# Altium PCB Copy of UAV_MCNV2P1.PcbDoc (part 2 of 2)
Units mil, origin at the board's own origin, x right, y up, seen from the top; angles counter-clockwise.
Board outline 1765.59 x 1577.6 mil, 6 copper layers (Component Side, Inner Layer 1, Power Plane (VCC), Ground Plane (GND), Inner Layer 2, Solder Side), stack 64.373 mil thick; 120 components, 102 nets, 559 pads, 317 vias.
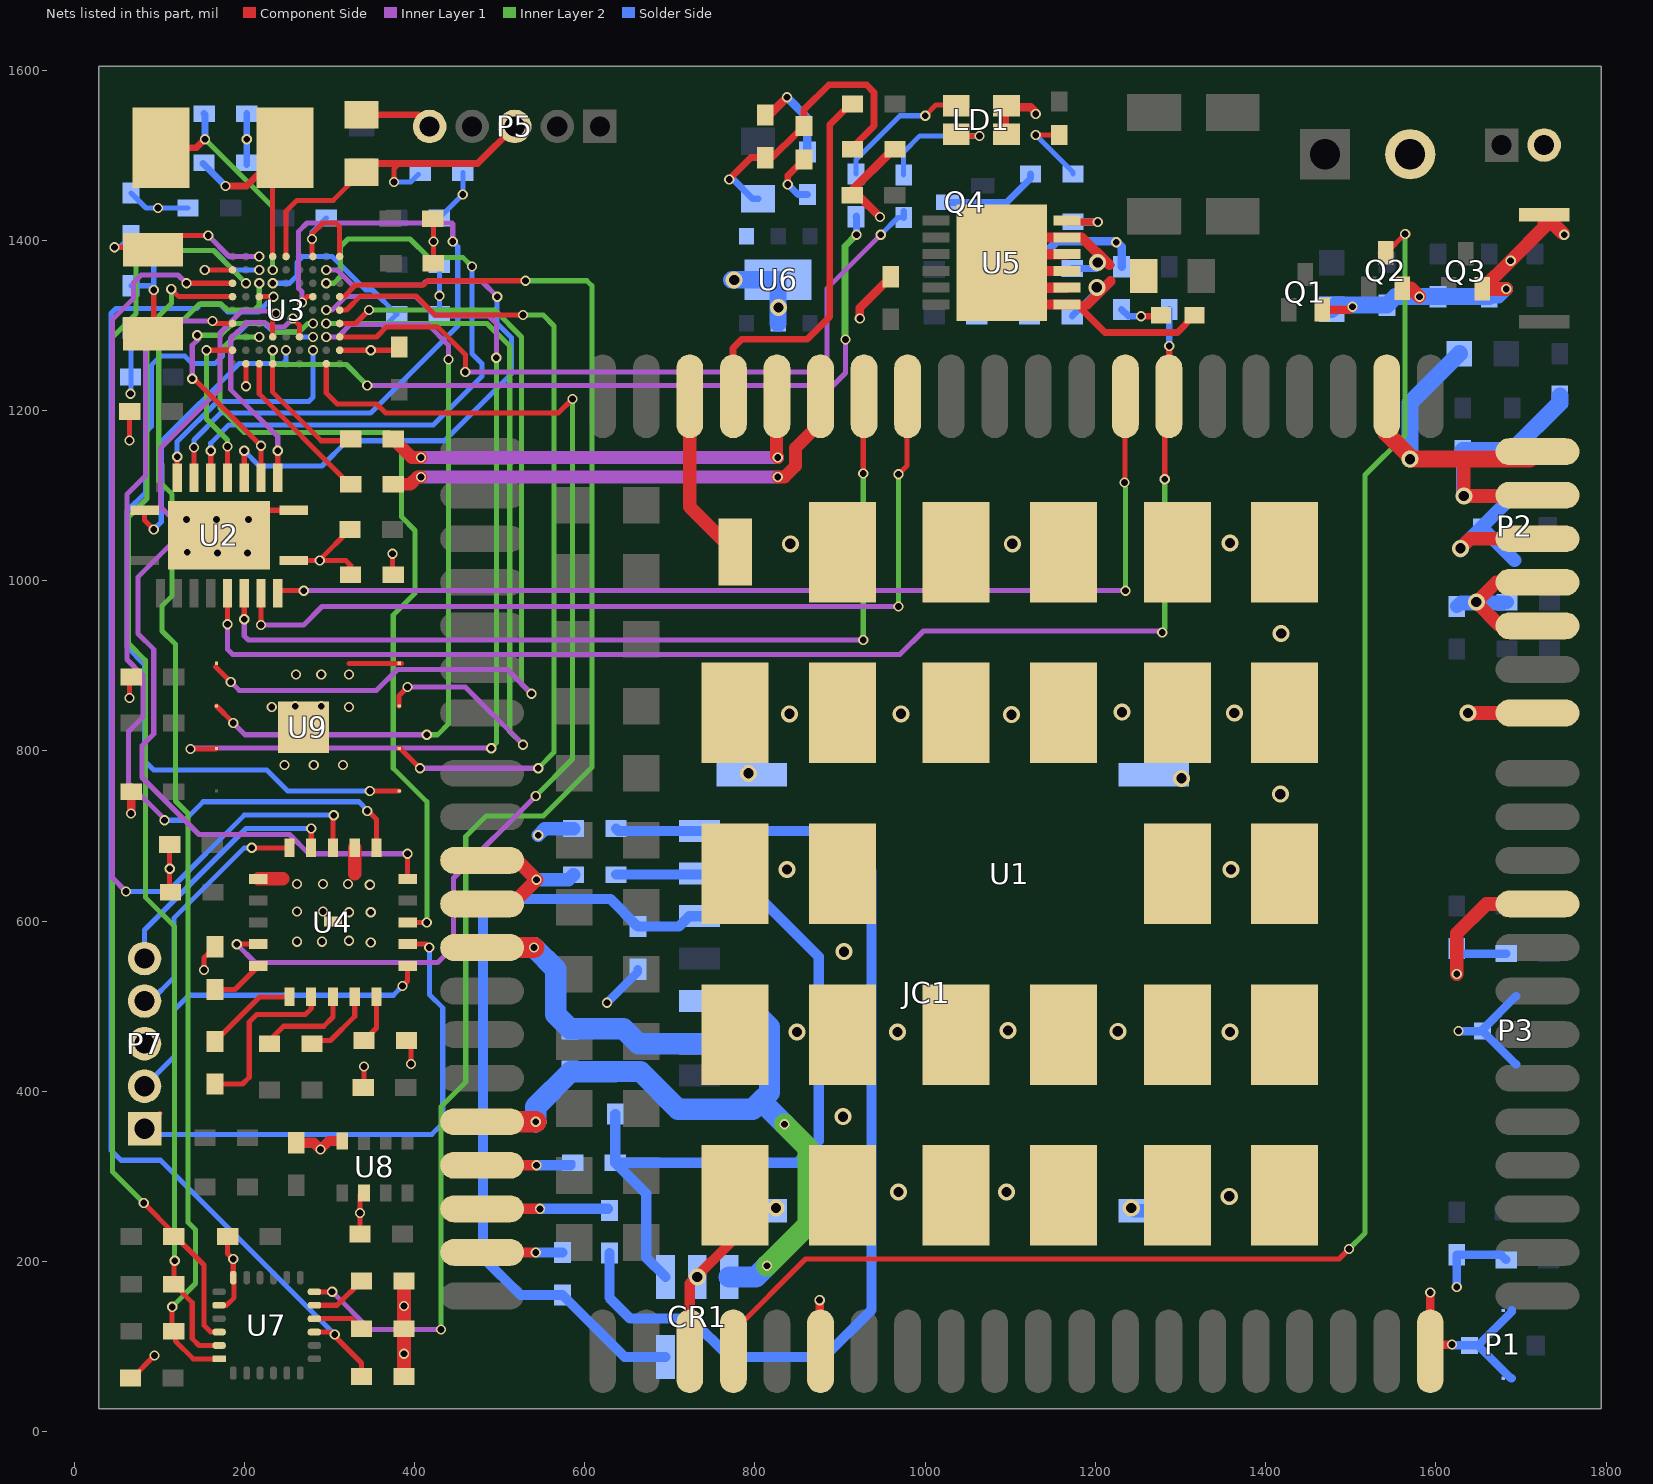
[diagram p6: the nets of this part, all layers, seen from the top]

## Via types
v1: diameter 12, hole 8, Component Side to Solder Side, 259 vias
v2: diameter 20, hole 12, Component Side to Solder Side, 55 vias
v3: diameter 47.24, hole 31.5, Component Side to Solder Side, 2 vias
v4: diameter 8.27, hole 7.87, Component Side to Solder Side, 1 vias

## Nets (pads, with @x,y where several pads share a name; then routed paths per layer and width w, separated by ;. In a path a pad name is that pad's centre, name@x,y a point inside that pad or via, vN(x,y) a via of type N, cw(c..) or ccw(c..) an arc to the next point about the centre after c; other vN are vias at no path point) (continued)
EC20_RI: U1.62 U2.9 | length 1226.4
  Component Side w6: U2.9@239.17,985.24 242.13,988.19 v1(269.68,988.19) ; v1(1234.25,1115.16) 1234.69,1115.6 U1.62@1234.69,1216.73
  Inner Layer 1 w6: v1(269.68,988.19) v1(1235.24,988.19)
  Inner Layer 2 w6: v1(1234.25,1115.16) 1235.24,1114.17 v1(1235.24,988.19)
EC20_RST: Q2.3 U1.20 | length 2046.3
  Component Side w6: U1.20@774.61,94.49 774.61,118.11 859.25,202.76 1486.22,202.76 v1(1498.03,214.57) ; Q2.3@1534.22,1385.07 Q2.3@1541.01,1385.07 1541.57,1385.07 v1(1563.98,1407.48)
  Inner Layer 2 w6: v1(1498.03,214.57) 1516.73,233.27 1516.73,1124.02 1563.98,1171.26 v1(1563.98,1407.48)
EC20_RX: U1.68 U2.7 | length 1067.4
  Component Side w6: v1(199.8,954.72) U2.7@199.8,985.24 ; v1(927.17,1125.98) 927.17,1216.29 U1.68@927.61,1216.73
  Inner Layer 1 w6: v1(199.8,954.72) 199.8,935.04 204.72,930.12 v1(927.17,930.12) ; v1(927.17,1125.98) v1@927.17,1126.97
  Inner Layer 2 w6: v1(927.17,930.12) v1(927.17,1125.98)
EC20_STA: R4.1 U1.61 U2.6 | length 1573.1
  Component Side w6: v1(180.12,948.82) U2.6@180.12,985.24 ; v1(1281.5,1119.09) 1281.5,1192.67 1294.29,1205.46 1284.45,1215.31 U1.61@1285.87,1216.73
  Component Side w8: U1.61@1285.87,1216.73 1286.7,1217.56 v1(1286.7,1275.73)
  Inner Layer 1 w6: v1(180.12,948.82) 180.12,919.29 186.02,913.39 970.47,913.39 998.03,940.94 1276.57,940.94 v1(1278.54,938.98)
  Inner Layer 2 w6: v1(1278.54,938.98) 1276.57,938.98 1281.5,943.9 v1(1281.5,1119.09)
  Solder Side w8: v1(1286.7,1275.73) R4.1@1286.7,1318.73
EC20_TX: U1.67 U2.8 | length 1056
  Component Side w6: v1(219.49,947.83) U2.8@219.49,985.24 ; v1(968.5,1125) 978.79,1135.28 978.79,1216.73 982.28,1213.24 U1.67@979.33,1210.28
  Inner Layer 1 w6: v1(219.49,947.83) 269.69,947.83 291.34,969.49 v1(968.5,969.49)
  Inner Layer 2 w6: v1(968.5,969.49) v1(968.5,1125)
FLASH_CS: U3.G3 U9.1 | length 1029.1
  Component Side w6: v1(347.44,752.95) 347.64,752.76 U9.1@381.89,752.76
  Solder Side w6: v1(280.51,1286.42) 267.72,1286.42 261.81,1292.32 233.27,1292.32 222.44,1303.15 204.72,1303.15 174.21,1272.64 174.21,1263.78 165.35,1254.92 138.78,1254.92 129.92,1263.78 101.38,1263.78 90.55,1252.95 90.55,1181.1 83.66,1174.21 83.66,1103.35 62.01,1081.69 62.01,922.24 82.68,901.57 82.68,788.39 93.5,777.56 226.38,777.56 250.98,752.95 v1(347.44,752.95)
GND: C1.2 C2.2 C3.2 C5.2 C6.2 C7.2 C8.1 C9.1 C10.1 C11.1 C12.1 C13.1 C14.2 C15.2 C16.1 C17.2 C18.2 C19.1 C20.1 C21.2 C22.2 C23.2 C24.1 C25.2 C26.1 C27.2 C29.1 C30.2 C32.2 C33.2 C34.1 C35.1 C36.1 C37.1 C39.2 C40.1 C41.1 C42.1 C43.1 C44.1 C45.1 C46.1 C47.2 C48.1 C49.2 C50.1 C51.1 C52.2 C53.1 C54.2 CR1.2 D1.1 JC1.0 JP1.2 LD1.2 P1.2 P1.3 P1.4 P2.2 P2.3 P2.4 P3.2 P3.3 P3.4 P4.2 P5.5 P7.3 Q1.2 Q2.2 Q3.2 Q4.2 R10.2 R11.2 R16.2 R19.2 R22.2 R23.1 R27.1 R30.1 SB1.2 U1.8 U1.9 U1.19 U1.22 U1.36 U1.46 U1.48 U1.50 U1.51 U1.52 U1.53 U1.54 U1.56 U1.72 U1.85 U1.86 U1.87 U1.88 U1.89 U1.90 U1.91 U1.92 U1.93 U1.94 U1.95 U1.96 U1.97 U1.98 U1.99 U1.100 U1.101 U1.102 U1.103 U1.104 U1.105 U1.106 U1.107 U1.108 U1.109 U1.110 U1.111 U1.112 U2.11 U2.21 U3.A8 U3.B1 U3.G9 U3.J2 U3.J9 U4.12 U4.16 U4.21 U6.2 U6.7 U7.18 U7.20 U8.1 U8.7 U9.4 U9.9 | length 5834
  Component Side w6: v1(64.96,862.2) 64.96,886.61 C16.1@65.16,886.81 ; v1(65.16,1164.57) C20.1@65.16,1198.82 ; C49.2@68.11,62.99 v1(94.49,89.37) ; C51.1@112.2,689.96 v1(112.2,661.42) 112.2,634.84 C32.2@113.19,633.86 ; v1(152.56,542.32) 152.56,556.89 C30.2@165.35,569.68 ; v1(153.54,1365.16) U3.A8@186.02,1365.16 ; U2.21@170.28,1053.15 199.8,1082.68 U2.11@257.87,1082.68 ; U7.20@170.3,148.53 179.04,148.53 187.99,157.48 187.99,179.83 U7.18@186.93,180.89 v1(186.93,202.84) 180.31,209.45 C47.2@180.31,229.33 ; v1(201.77,1228.35) U3.B1@201.77,1254.92 ; U4.16@216.54,649.61 U4.16@217.52,650.59 ; C46.1@254.92,339.57 C46.1@260.83,339.57 ; U3.G9@280.51,1380.91 279.53,1381.89 v1(279.53,1401.57) 279.53,1407.48 292.32,1420.28 307.09,1420.28 312.01,1415.35 U3.J9@312.01,1380.91 ; U3.J2@312.01,1270.67 378.15,1270.67 C24.1@381.89,1274.41 ; U8.1@315.95,340.55 U8.1@316.93,341.54 ; 323.03,902.76 384.84,902.76 ; C45.1@335.83,232.28 v1(335.83,256.89) U8.7@335.83,278.35 ; R23.1@339.76,404.53 340.55,405.31 v1(340.55,429.13) ; U8.7@342.52,280.51 U8.7@344.68,278.35 ; v1(374.02,1031.5) 374.02,1007.68 R10.2@374.8,1006.89 ; C29.1@390.55,459.64 395.67,454.53 v1(395.67,432.09) ; C52.2@428.15,1425.2 422.24,1419.29 v1(422.24,1398.62) 422.24,1378.74 C53.1@429.92,1371.06
  Component Side w8: SB1.2@337.7,1547.48 403.95,1547.48 P5.5@417.7,1533.73
  Component Side w10: v1(66.93,726.38) 67.13,726.57 C50.1@67.13,751.97 ; U1.112@776.57,227.36 U1.112@776.57,277.56 ; C44.1@812.01,1547.05 816.73,1547.05 v1(837.6,1567.91) ; v1(875.98,154.53) 875.98,95.47 U1.22@876.97,94.49 ; v1(923.23,1308.07) 923.23,1320.67 C42.1@959.65,1357.09 ; v1(946.85,1427.17) 921.26,1452.76 C41.1@914.37,1452.76 912.4,1452.76 912.4,1456.89 C43.1@962.4,1506.89 ; LD1.2@1093.5,1522.64 1093.5,1556.1 1124.02,1556.1 1129.92,1550.2 v1(1129.92,1548.23) ; Q1.2@1466.38,1318.39 1498.51,1318.39 v1(1501.97,1321.85) ; v1(1593.5,163.39) U1.36@1593.5,94.49 1601.38,102.36 v1(1619.09,102.36)
  Component Side w12: C46.1@260.83,339.57 281.5,339.57 v1(289.37,331.69) 299.21,341.54 U8.1@314.96,341.54 ; U1.19@723.43,94.49 723.43,174.21 U1.112@776.57,227.36
  Component Side w16: U4.16@216.54,649.61 245.08,649.61 ; 329.72,655.51 U4.12@329.72,686.02 ; R30.1@387.6,64.96 v1(387.6,91.54) C48.1@387.6,121.06 v1(387.6,147.64) R27.1@387.6,177.17 ; U1.9@479.33,620.08 514.76,620.08 v1(543.31,648.62) 520.67,671.26 U1.8@479.33,671.26 ; U1.72@723.43,1216.53 723.43,1086.61 U1.108@776.57,1033.46 ; Q2.2@1560.7,1343.73 1570.64,1343.73 v1(1580.71,1333.66) ; v1(1624.7,537.7) 1624.7,585.33 1659.45,620.08 U1.46@1719.49,620.08 ; v2(1628.94,1037.97) 1640.18,1049.21 U1.52@1719.49,1049.21 ; 1632.87,1142.73 v2(1632.87,1099.41) 1718.51,1099.41 U1.53@1719.49,1100.39 ; v2(1637.8,844.49) U1.48@1719.49,844.49 ; v1(1682.86,1342.73) Q3.2@1654.7,1342.73 v1(1687.95,1375.98) 1727.36,1415.39 D1.1@1727.36,1430.12 v1@1749.02,1408.46 ; U1.50@1719.49,946.85 1675.52,946.85 v2(1647.64,974.73) 1670.94,998.03 U1.51@1719.49,998.03
  Component Side w20: U1.56@1541.78,1216.73 1541.78,1173.65 1569.7,1145.73 v2(1569.7,1142.73) 1632.87,1142.73 1709.9,1142.73 U1.54@1718.94,1151.77
  Solder Side w6: v1(66.14,1219.68) 66.93,1220.47 C27.2@66.93,1296.46 ; C25.2@66.93,1455.51 84.45,1437.99 v1(98.43,1437.99) C26.1@133.86,1437.99 ; v1(279.53,1401.57) 279.53,1409.45 C18.2@296.26,1426.18 ; C23.2@422.24,1377.95 C23.2@429.13,1371.06 v1(429.13,1334.65) R11.2@429.13,1312.99 ; C17.2@429.13,1426.18 v1(456.7,1453.75) C19.1@456.7,1479.73
  Solder Side w8: C21.2@202.7,1488.73 202.7,1518.7 C22.2@202.7,1548.73
  Solder Side w10: v1(625.98,503.94) 662.4,540.35 C35.1@662.4,543.5 ; v1(837.6,1567.91) 861.7,1543.81 R22.2@861.7,1503.73 ; C33.2@1060.7,1310.73 C39.2@1122.7,1310.73 C40.1@1122.7,1366.73 ; C34.1@1060.7,1365.73 1121.7,1365.73 C40.1@1122.7,1366.73 ; Q4.2@1067.7,1424.73 1120.7,1424.73 R16.2@1123.7,1421.73 C40.1@1123.7,1367.73 ; R19.2@1230.7,1368.73 1230.7,1392.33 1225.39,1397.64 1224.41,1398.62 1154.59,1398.62 C40.1@1123.7,1367.73 ; v1(1619.09,102.36) 1620.08,101.38 P1.3@1639.76,101.38 P1.3@1649.61,101.38 ; v1(1624.7,169.98) C1.2@1624.7,207.73 1676.7,207.73 C5.2@1682.7,201.73 ; v1(1624.7,537.7) C3.2@1624.7,567.73 1630.7,561.73 C15.2@1682.7,561.73 ; C2.2@1624.7,969.73 1678.7,969.73 C14.2@1683.7,974.73 ; v1(1626.71,470.73) P3.3@1654.94,470.73 ; 1688.98,62.58 1688.4,62.58 P1.3@1649.61,101.38 ; 1688.98,142.38 1688.98,140.75 P1.3@1649.61,101.38 ; P2.2@1692.49,1023.94 P2.2@1693.07,1023.94 ; P3.2@1694.31,431.94 1693.73,431.94 P3.3@1654.94,470.73 ; P3.4@1694.31,511.73 1654.94,472.36 P3.3@1654.94,470.73 ; C40.1@1122.7,1366.73 C40.1@1123.7,1367.73
  Solder Side w16: v1(543.31,648.62) 580.91,648.62 C37.1@586.81,654.53 ; v1(545.28,700.79) 553.15,708.66 C36.1@586.81,708.66 ; v2(1242.13,262.8) 1245.28,259.65 JC1.0@1296.85,259.65 ; C2.2@1624.7,969.73 1629.7,974.73 v2(1647.64,974.73) C14.2@1683.7,974.73 ; v2@1628.94,1035.43 v2(1628.94,1037.97) P2.3@1653.7,1062.73 ; v2@1631.7,1100.58 C13.1@1631.7,1152.73 ; C9.1@1662.7,1333.73 1673.86,1333.73 v1(1682.86,1342.73) ; P2.2@1692.49,1023.94 P2.3@1653.7,1062.73 ; P2.4@1693.07,1103.73 1693.07,1102.1 P2.3@1653.7,1062.73
  Solder Side w20: v2@772.64,1353.35 772.84,1353.55 U6.7@827.3,1353.55 U6.2@827.3,1302.37 ; C6.2@1477.7,1318.73 1482.7,1323.73 C8.1@1542.7,1323.73 1552.7,1333.73 C10.1@1602.7,1333.73 C9.1@1662.7,1333.73 ; v2(1569.7,1142.73) 1569.7,1208.73 C7.2@1627.7,1266.73 ; C13.1@1631.7,1152.73 C12.1@1689.7,1152.73 1745.7,1208.73 C11.1@1745.7,1216.73
  other v1: 348.43,574.8 261.81,575.79 291.34,575.79 322.83,576.77 322.83,610.24 348.43,610.24 261.81,611.22 292.32,611.22 347.44,642.72 261.81,643.7 292.32,643.7 321.85,643.7 247.05,783.46 281.5,783.46 315.94,783.46 232.28,851.38 322.83,851.38 259.84,852.36 290.35,852.36 260.83,889.76 290.35,889.76 322.83,889.76 168.31,1032.48 203.74,1032.48 132.87,1033.46 131.89,1071.85 167.32,1071.85 204.72,1071.85 348.43,1270.67 1224.41,1397.64 1750.98,1406.5 202.76,1518.7
  other v2: 732.28,181.84 824.8,262.8 1357.28,276.57 968.5,281.5 1095.47,281.5 903.54,370.08 849.41,469.49 967.52,469.49 1358.27,469.49 1226.38,470.47 1097.44,471.46 904.53,563.98 837.6,660.43 1359.25,660.43 1417.32,749.02 1301.18,767.72 792.32,773.62 1101.38,842.52 840.55,843.5 971.46,843.5 1363.19,844.49 1231.3,845.47 1418.31,937.99 841.54,1043.31 1102.36,1043.31 1358.27,1044.29 827.76,1320.87 775.59,1353.35
MCU_232_RX: P7.2 U4.6 | length 410
  Component Side w6: v1(385.83,523.62) 391.73,529.53 U4.6@391.73,547.24
  Solder Side w6: P7.2@82.68,405.91 118.11,441.34 118.11,496.06 134.84,512.8 375,512.8 v1(385.83,523.62)
MCU_232_TX: P7.1 U4.7 | length 624.4
  Component Side w6: P7.1@82.68,355.91 P7.1@100.79,374.02 ; U4.7@391.73,572.84 413.38,572.84 v1(417.32,568.9)
  Solder Side w6: P7.1@82.68,355.91 89.17,349.41 420.28,349.41 433.07,362.2 433.07,498.03 417.32,513.78 v1(417.32,568.9)
MCU_DBRX: U3.C3 U4.8 | length 968.7
  Component Side w6: U4.8@391.73,598.43 v1(414.37,598.43)
  Inner Layer 2 w6: v1(217.52,1286.42) 187.99,1286.42 171.26,1269.69 171.26,1202.76 199.8,1174.21 370.08,1174.21 384.84,1159.45 384.84,1074.8 400.59,1059.06 400.59,985.24 375,959.65 375,779.53 414.37,740.16 v1(414.37,598.43)
MCU_DBTX: U3.D3 U4.10 | length 1072.2
  Component Side w6: U3.D3@233.27,1286.42 233.27,1310.04 v1(237.2,1313.98) ; U4.10@391.73,649.61 v1(391.73,679.13)
  Inner Layer 1 w6: v1(237.2,1313.98) 235.24,1313.98 232.28,1316.93 196.85,1316.93 171.26,1291.34 171.26,1225.39 101.38,1155.51 101.38,1086.61 114.17,1073.82 114.17,1043.31 74.8,1003.94 74.8,937.99 93.5,919.29 93.5,819.88 79.72,806.1 79.72,768.7 146.65,701.77 252.95,701.77 275.59,679.13 v1(391.73,679.13)
MCU_EC20_DBRX: U2.16 U3.H7 | length 752.8
  Component Side w6: U2.16@160.43,1121.06 v1(160.43,1152.56)
  Inner Layer 2 w6: v1(296.26,1349.41) 305.12,1349.41 312.99,1357.28 312.99,1392.72 321.85,1401.57 394.69,1401.57 416.34,1379.92 456.69,1379.92 v1(467.52,1369.09)
  Solder Side w6: v1(160.43,1152.56) 160.43,1161.42 182.09,1183.07 422.24,1183.07 479.33,1240.16 479.33,1254.92 467.52,1266.73 v1(467.52,1369.09)
MCU_EC20_DBTX: U2.17 U3.G6 | length 819.4
  Component Side w6: U2.17@140.75,1121.06 v1(140.75,1156.5) ; v1(267.72,1326.77) 267.72,1327.76 273.62,1333.66 U3.G6@280.51,1333.66
  Inner Layer 1 w6: v1(267.72,1326.77) 267.72,1339.57 263.78,1343.5 263.78,1410.43 273.62,1420.28 443.9,1420.28 444.88,1419.29 v1(444.88,1398.62)
  Solder Side w6: v1(140.75,1156.5) 140.75,1165.35 172.24,1196.85 348.43,1196.85 450.79,1299.21 450.79,1392.72 v1(444.88,1398.62)
MCU_EC20_NMODE: U2.18 U3.G2 | length 278.6
  Component Side w6: U2.18@121.06,1121.06 v1(121.06,1145.67)
  Solder Side w6: v1(121.06,1145.67) 121.06,1163.39 168.31,1210.63 275.77,1210.63 280.51,1215.37 v1(280.51,1270.67)
MCU_EC20_RDY: U2.20 U3.E2 | length 332.1
  Component Side w6: U2.20@82.68,1082.68 82.68,1070.87 v1(93.5,1060.04)
  Solder Side w6: v1(93.5,1060.04) 102.36,1068.9 102.36,1163.39 193.9,1254.92 245.08,1254.92 249.02,1258.86 v1(249.02,1270.67)
MCU_EC20_RI: U2.12 U3.F3 | length 297.8
  Component Side w6: U2.12@239.17,1121.06 v1(239.17,1152.56) ; v1(256.89,1308.07) 264.76,1300.2 U3.F3@264.76,1286.42
  Inner Layer 1 w6: v1(239.17,1152.56) 239.17,1169.29 184.06,1224.41 184.06,1284.45 202.76,1303.15 224.41,1303.15 229.33,1298.23 247.05,1298.23 v1(256.89,1308.07)
MCU_EC20_RX: U2.13 U3.G4 | length 357.1
  Component Side w6: v1(138.78,1237.2) 140.75,1237.2 v1(219.49,1158.46) U2.13@219.49,1121.06
  Inner Layer 1 w6: v1(138.78,1237.2) 138.78,1276.57 146.65,1284.45 144.68,1286.42 v1(144.68,1288.39)
  Inner Layer 2 w6: v1@145.67,1289.37 v1(144.68,1288.39) 172.24,1288.39 186.02,1302.17 225.39,1302.17 235.24,1292.32 264.76,1292.32 274.61,1302.17 v1(280.51,1302.17)
MCU_EC20_STA: U2.15 U3.A2 | length 190.3
  Component Side w6: v1(155.51,1270.67) U3.A2@186.02,1270.67 ; U2.15@180.12,1121.06 v1(180.12,1157.48)
  Inner Layer 2 w6: v1(155.51,1270.67) 155.51,1189.96 180.12,1165.35 v1(180.12,1157.48)
MCU_EC20_TX: U2.14 U3.H8 | length 712.2
  Component Side w6: U2.14@199.8,1121.06 v1(199.8,1152.56)
  Inner Layer 1 w6: v1(296.26,1365.16) 309.06,1365.16 326.77,1347.44 409.45,1347.44 413.39,1351.38 479.33,1351.38 v1(497.05,1333.66)
  Solder Side w6: v1(199.8,1152.56) 217.52,1134.84 291.34,1134.84 320.87,1164.37 435.04,1164.37 513.78,1243.11 513.78,1285.43 497.05,1302.17 v1(497.05,1333.66)
MCU_LED_G: R8.1 U3.D2 | length 894.7
  Inner Layer 1 w6: v1(344.49,1229.33) 891.73,1229.33 906.5,1244.09 v1(906.5,1283.46)
  Inner Layer 2 w6: v1(233.27,1270.67) 233.27,1257.87 237.2,1253.94 319.88,1253.94 v1(344.49,1229.33)
  Inner Layer 2 w8: v1@905.7,1283.46 905.7,1392.91 v1(919.29,1406.5)
  Solder Side w8: R8.1@918.7,1427.73 919.29,1428.32 v1(919.29,1406.5)
MCU_LED_R: R7.1 U3.J3 | length 834.2
  Component Side w6: U3.J3@312.01,1286.42 355.31,1286.42 367.13,1298.23 427.17,1298.23 459.65,1265.75 v1(459.65,1245.08)
  Inner Layer 1 w6: v1(459.65,1245.08) 869.09,1245.08 884.84,1260.83 884.84,1343.5 v1(947.83,1406.5)
  Solder Side w6: v1@949.66,1406.5 v1(947.83,1406.5) 968.07,1426.73 R7.1@974.7,1426.73
  Solder Side w8: R7.1@974.7,1426.73 R7.1@974.7,1433.73
MP_CS: R24.1 U3.B7 U7.22 | length 1475.1
  Component Side w6: v1(81.69,268.7) 117.13,233.27 R24.1@117.13,229.33 ; R24.1@119.09,229.33 152.56,195.87 152.56,125 160.53,117.03 U7.22@170.31,117.03
  Inner Layer 2 w6: v1(81.69,268.7) 45.28,305.12 45.28,1286.42 72.83,1313.98 72.83,1373.03 87.6,1387.8 163.39,1387.8 v1(201.77,1349.41)
MP_INT: U3.J6 U7.12 | length 1812.6
  Component Side w6: U7.12@282.3,164.28 303.06,164.28 v1(303.15,164.37) ; U3.J6@312.01,1333.66 316.93,1333.66 330.71,1347.44 410.43,1347.44 415.35,1352.36 v1(530.51,1352.36)
  Inner Layer 1 w6: v1(303.15,164.37) 347.44,120.08 v1(431.1,120.08)
  Inner Layer 2 w6: v1(431.1,120.08) 431.1,381.89 460.14,410.93 460.14,699.31 484.25,723.43 551.18,723.43 608.27,780.51 608.27,1346.46 602.36,1352.36 v1(530.51,1352.36)
MP_SCK: R29.1 U3.A6 U7.23 | length 1396.2
  Component Side w6: v1(114.17,1342.52) 123.03,1333.66 U3.A6@186.02,1333.66 ; v1(118.11,200.79) 117.13,199.8 R29.1@117.13,173.23 138.78,151.58 138.78,109.25 146.75,101.28 U7.23@170.31,101.28
  Inner Layer 2 w6: v1(114.17,1342.52) 114.17,1325.79 85.63,1297.24 85.63,1096.46 63.98,1074.8 63.98,926.18 83.66,906.5 83.66,627.95 118.11,593.5 v1(118.11,200.79)
MP_SDI: R26.1 U3.C7 U7.24 | length 1439.6
  Component Side w6: v1(115.16,146.65) 115.16,120.08 R26.1@117.13,118.11 ; R26.1@119.09,118.11 119.09,106.3 139.86,85.54 U7.24@170.31,85.54
  Inner Layer 2 w6: v1(115.16,146.65) 142.72,174.21 142.72,237.2 133.86,246.06 133.86,726.38 119.09,741.14 119.09,925.2 103.35,940.94 103.35,970.47 115.16,982.28 115.16,1101.38 99.41,1117.13 99.41,1277.56 146.65,1324.8 173.23,1324.8 180.12,1317.91 211.61,1317.91 217.52,1323.82 v1(217.52,1349.41)
MP_SDO: R30.2 U3.C6 U7.9 | length 1645
  Component Side w6: U3.C6@217.52,1333.66 v1(234.25,1333.66) ; U7.9@282.28,117.03 301.27,117.03 337.6,80.71 R30.2@337.6,64.96
  Solder Side w6: v1(234.25,1333.66) 216.54,1315.94 180.12,1315.94 171.26,1324.8 148.62,1324.8 143.7,1319.88 49.21,1319.88 43.31,1313.98 43.31,330.71 55.12,318.9 101.38,318.9 v1(306.1,114.17)
NetC21_1: C21.1 U3.D9 X1.2 | length 239.2
  Component Side w6: U3.D9@233.27,1380.91 233.27,1494.3 X1.2@247.7,1508.73
  Component Side w8: v1(177.7,1463.73) 202.7,1463.73 X1.2@233.27,1494.3
  Solder Side w8: C21.1@151.43,1490.01 v1(177.7,1463.73)
NetC22_1: C22.1 U3.D8 X1.1 | length 272.8
  Component Side w8: X1.1@102.03,1508.73 143.7,1508.73 v1(153.7,1518.73)
  Inner Layer 2 w6: v1(153.7,1518.73) 233.27,1439.17 v1(233.27,1365.16)
  Solder Side w8: C22.1@152.7,1548.73 153.7,1547.73 v1(153.7,1518.73)
NetC25_1: C25.1 U3.C9 X2.2 | length 197.4
  Component Side w6: v1(47.24,1391.73) 89.7,1391.73 X2.2@92.7,1388.73 ; X2.2@105.32,1405.51 v1(157.48,1405.51)
  Inner Layer 1 w6: v1(157.48,1405.51) 182.09,1380.91 v1(217.52,1380.91)
  Solder Side w6: v1@47.24,1388.78 v1(47.24,1391.73) 53.15,1391.73 C25.1@66.93,1405.51
NetC27_1: C27.1 U3.C8 X2.1 | length 256.4
  Component Side w6: X2.1@92.7,1290.31 93.5,1291.11 v1(93.5,1341.54)
  Solder Side w6: C27.1@66.93,1346.46 88.58,1346.46 v1(93.5,1341.54) 93.5,1381.89 99.41,1387.8 164.37,1387.8 187.01,1365.16 v1(217.52,1365.16)
NetC28_1: C28.1 U4.3 | length 109.8
  Component Side w6: C28.1@229.33,459.64 246.06,476.38 293.31,476.38 304.13,487.21 U4.3@304.13,510.83
NetC28_2: C28.2 U4.4 | length 84.9
  Component Side w6: C28.2@279.33,459.64 301.18,459.64 329.72,488.19 U4.4@329.72,510.83
NetC29_2: C29.2 U4.5 | length 57.3
  Component Side w6: C29.2@340.55,459.64 355.31,474.41 U4.5@355.31,510.83
NetC30_1: C30.1 U4.20 | length 62.6
  Component Side w6: C30.1@165.35,519.68 188.98,519.68 U4.20@216.54,547.24
NetC31_1: C31.1 U4.1 | length 109.3
  Component Side w6: C31.1@165.35,458.46 217.72,510.83 U4.1@252.95,510.83
NetC31_2: C31.2 U4.2 | length 201.7
  Component Side w6: C31.2@165.35,408.46 197.83,408.46 205.71,416.34 205.71,481.3 214.57,490.16 271.65,490.16 278.54,497.05 U4.2@278.54,510.83
NetC35_2: C35.2 CR1.5 JC1.2 R15.2 | length 953.4
  Solder Side w12: CR1.5@694.88,87.84 646.61,87.84 R15.2@573.82,160.63 524.41,160.63 480.32,204.72 480.32,606.3 500,625.98 629.92,625.98 C35.2@662.4,593.5 710.63,593.5 722.83,605.71 JC1.2@742.52,605.71
NetC36_2: C36.2 CR1.4 JC1.3 R14.2 | length 1248.5
  Solder Side w12: R14.2@628.94,209.84 628.94,157.48 653.54,132.87 724.65,132.87 CR1.4@769.69,87.84 881.65,87.84 937.01,143.2 937.01,658.46 889.76,705.71 639.76,705.71 C36.2@636.81,708.66
NetC37_2: C37.2 CR1.1 JC1.7 R13.2 R17.1 | length 961.3
  Solder Side w12: R17.1@635.83,373.23 R13.2@635.83,315.94 ; C37.2@636.81,654.53 761.61,654.53 762.8,655.71 777.36,655.71 875,558.07 875,341.54 849.41,315.94 R13.2@635.83,315.94 ; CR1.1@694.88,181.84 672.24,204.48 672.24,279.53 R13.2@635.83,315.94
NetC39_1: C39.1 C40.2 LD2.1 SB2.1 U5.1 U5.2 U5.3 U5.4 U5.5 U5.13 | length 731.4
  Component Side w8: U5.13@1119.23,1403.26 1099.54,1383.57 U5.13@1089.7,1373.73 1099.54,1363.89 1119.23,1344.2 U5.13@1138.91,1324.52 ; U5.1@1178.49,1324.52 1211.28,1291.73 1296.39,1291.73 LD2.1@1315.39,1310.73 ; 1183.49,1324.52 1190.49,1324.52 ; LD2.1@1315.39,1310.73 LD2.1@1316.39,1311.73 1316.7,1310.73 LD2.1@1315.39,1310.73
  Component Side w12: U5.13@1099.54,1363.89 U5.3@1166.57,1363.89 ; U5.13@1099.54,1383.57 U5.4@1166.57,1383.57 ; U5.13@1119.23,1344.2 U5.2@1166.57,1344.2 ; U5.13@1119.23,1403.26 U5.5@1166.57,1403.26 1184.17,1403.26 1216.7,1370.73 ; U5.13@1138.91,1324.52 U5.1@1166.57,1324.52 U5.1@1178.49,1324.52 ; 1190.49,1324.52 1217.7,1351.73
  Solder Side w8: C39.1@1172.7,1310.73 1198.7,1336.73 1190.49,1324.52 ; C40.2@1172.7,1366.73 v2@1201.7,1366.73
  other v2: 1201.7,1344.73 1202.7,1373.73
NetC43_2: C43.2 C44.2 LD4.1 SB3.1 U6.4 | length 365.2
  Component Side w8: v1(769.68,1471.46) 795.28,1497.05 C44.2@812.01,1497.05 C44.2@812.01,1488.72 ; C44.2@811.7,1488.42 C44.2@812.01,1488.72 ; C43.2@912.4,1506.89 939.96,1534.45 939.96,1573.82 931.1,1582.68 886.81,1582.68 857.7,1553.57 LD4.1@857.7,1534.42 C44.2@812.01,1488.72
  Solder Side w8: v1(769.68,1471.46) 774.61,1471.46 797.33,1448.73 SB3.1@803.7,1448.73
NetC48_2: C48.2 U7.10 | length 60.2
  Component Side w6: U7.10@282.3,132.78 325.88,132.78 C48.2@337.6,121.06
NetLD1_1: LD1.1 R8.2 | length 159.2
  Component Side w6: v1(1000,1546.26) 1012.8,1559.06 LD1.1@1034.45,1559.06
  Solder Side w6: R8.2@918.7,1477.73 918.7,1494.49 970.47,1546.26 v1(1000,1546.26)
NetLD1_3: LD1.3 R7.2 | length 156.4
  Component Side w6: LD1.3@1032.48,1520.67 1034.45,1522.64 v1(1063.98,1522.64)
  Solder Side w6: R7.2@974.7,1476.73 974.7,1503.65 993.69,1522.64 v1(1063.98,1522.64)
NetLD2_2: LD2.2 R19.1 | length 51
  Component Side w8: v1(1253.7,1310.73) 1277.33,1310.73 LD2.2@1277.02,1311.73
  Solder Side w8: R19.1@1230.7,1318.73 1238.7,1310.73 v1(1253.7,1310.73)
NetLD3_2: LD3.2 R21.1 | length 91.6
  Component Side w6: v1(1129.92,1523.62) LD3.2@1157.48,1523.62
  Solder Side w6: v1(1129.92,1523.62) 1173.7,1479.84 R21.1@1173.7,1477.73
NetLD4_2: LD4.2 R22.1 | length 65.4
  Component Side w8: v1(838.58,1465.55) 838.58,1475.93 LD4.2@857.7,1495.05
  Solder Side w8: v1(838.58,1465.55) 850.4,1453.73 R22.1@861.7,1453.73
NetQ4_3: Q4.3 R21.2 | length 114.1
  Solder Side w8: Q4.3@1026.36,1444.42 1095.38,1444.42 1123.7,1472.73 R21.2@1123.7,1477.73
NetR9_1: R9.1 R10.1 U2.10 | length 126.3
  Component Side w6: U2.10@257.87,1023.62 v1(288.48,1023.62) ; R10.1@321.06,1013.78 325,1017.72 319.09,1023.62 v1(288.48,1023.62) ; R9.1@324.02,1060.04 288.48,1024.51 v1(288.48,1023.62)
NetR11_1: R11.1 U3.D7 | length 217.1
  Solder Side w6: v1(233.27,1349.41) 252.95,1349.41 261.81,1358.27 261.81,1374.02 268.7,1380.91 303.15,1380.91 342.52,1341.54 350.59,1341.54 R11.1@379.13,1312.99 364.37,1298.23
NetR16_1: R16.1 U5.6 | length 66.1
  Component Side w8: U5.6@1166.57,1422.94 1168.25,1421.26 v1(1202.76,1421.26)
  Solder Side w8: R16.1@1173.7,1421.73 1174.17,1421.26 v1(1202.76,1421.26)
NetR27_2: R27.2 U7.11 | length 67.2
  Component Side w6: U7.11@282.3,148.53 308.96,148.53 R27.2@337.6,177.17
NRST: C19.2 P5.3 SB1.1 U3.E9 | length 402.3
  Component Side w6: U3.E9@249.02,1380.91 249.02,1434.06 261.81,1446.85 304.57,1446.85 SB1.1@337.7,1479.98 ; v1(375.98,1468.5) 375.98,1484.25 381.89,1490.16
  Component Side w8: SB1.1@350.39,1490.16 381.89,1490.16 474.13,1490.16 P5.3@517.7,1533.73
  Solder Side w6: v1(375.98,1468.5) 395.47,1468.5 C19.2@404.33,1477.36
QPI_IO0: U3.J4 U9.5 | length 1061.8
  Component Side w6: 166.34,898.62 v1(184.06,880.91) ; U3.J4@312.01,1302.17 330.71,1302.17 v1(346.46,1317.91)
  Inner Layer 1 w6: v1(184.06,880.91) 193.9,871.06 355.31,871.06 379.92,895.67 508.86,895.67 v1(537.4,867.13)
  Inner Layer 2 w6: v1(346.46,1317.91) 494.09,1317.91 525.59,1286.42 525.59,878.94 v1(537.4,867.13)
QPI_IO1: U3.J5 U9.2 | length 975.4
  Component Side w6: U3.J5@312.99,1318.9 U3.J5@312.01,1317.91 319.88,1317.91 336.61,1334.65 401.57,1334.65 424.21,1312.01 v1(527.56,1312.01) ; U9.2@381.89,802.76 383.27,802.76 v1(406.5,779.53)
  Inner Layer 1 w6: v1(406.5,779.53) v1(545.28,779.53)
  Inner Layer 2 w6: v1(527.56,1312.01) 551.18,1312.01 563.98,1299.21 563.98,798.23 v1(545.28,779.53)
QPI_IO2: U3.H4 U9.3 | length 891.9
  Component Side w6: U9.3@381.89,852.76 381.89,865.16 v1(391.73,875)
  Inner Layer 1 w6: v1(391.73,875) 459.65,875 v1(527.56,807.09)
  Inner Layer 2 w6: v1(296.26,1302.17) 485.24,1302.17 511.81,1275.59 511.81,822.83 v1(527.56,807.09)
QPI_IO3: U3.H5 U9.7 | length 1105.3
  Component Side w6: v1(136.81,802.17) 166.73,802.17 U9.7@167.32,802.76
  Inner Layer 1 w6: v1(136.81,802.17) 137.8,803.15 v1(490.16,803.15) ; v1(296.26,1317.91) 303.15,1317.91 318.9,1333.66 401.57,1333.66 424.21,1311.02 487.2,1311.02 496.06,1302.17 v1(496.06,1261.81)
  Inner Layer 2 w6: v1(490.16,803.15) 496.06,809.06 v1(496.06,1261.81)
QPI_SCK: U3.H3 U9.6 | length 898.1
  Component Side w6: U9.6@167.32,852.76 187.01,833.07 v1(187.01,832.68)
  Inner Layer 1 w6: v1(187.01,832.68) 200.79,818.9 v1(414.37,818.9) ; v1(296.26,1286.42) 310.04,1286.42 324.8,1301.18 415.35,1301.18 439.96,1276.57 v1(439.96,1259.84)
  Inner Layer 2 w6: v1(414.37,818.9) 427.17,818.9 439.96,831.69 v1(439.96,1259.84) v1@440.94,1259.84
UAV_232_RDY: U3.H1 U4.19 | length 1339.4
  Component Side w6: v1(190.94,572.83) U4.19@216.54,572.84 ; U3.H1@296.26,1254.92 296.26,1220.47 309.06,1207.68 355.31,1207.68 366.14,1196.85 568.9,1196.85 v1(585.63,1213.58)
  Inner Layer 1 w6: v1(190.94,572.83) 212.6,551.18 427.17,551.18 445.87,569.88 445.87,650.59 v1(542.32,747.05)
  Inner Layer 2 w6: v1(542.32,747.05) 585.63,790.35 v1(585.63,1213.58)
UAV_232_RX: P7.4 U4.15 | length 285.8
  Component Side w6: v1(208.66,686.02) U4.15@252.95,686.02
  Solder Side w6: P7.4@82.68,505.91 89.57,505.91 117.13,533.46 117.13,603.35 199.8,686.02 v1(208.66,686.02)
UAV_232_TX: P7.5 U4.14 | length 301.5
  Component Side w6: U4.14@278.54,686.02 v1(278.54,708.66)
  Solder Side w6: P7.5@82.68,555.91 82.68,589.57 201.77,708.66 v1(278.54,708.66)
UAV_RX: U3.A7 U4.13 | length 1178.1
  Component Side w6: v1(131.89,1349.41) U3.A7@186.02,1349.41 ; U4.13@304.13,686.02 304.13,725.39 v1(305.12,724.41)
  Inner Layer 1 w6: v1(61.02,634.84) 45.28,650.59 45.28,1307.09 69.88,1331.69 69.88,1350.39 78.74,1359.25 122.05,1359.25 v1(131.89,1349.41)
  Solder Side w6: v1(61.02,634.84) 110.24,634.84 199.8,724.41 v1(305.12,724.41)
UAV_TX: U3.A4 U4.11 | length 1026.2
  Component Side w6: v1(162.4,1305.12) 165.35,1302.17 U3.A4@186.02,1302.17 ; v1(344.49,729.33) 345.47,729.33 355.31,719.49 U4.11@355.31,686.02
  Inner Layer 1 w6: v1(106.3,718.5) 106.3,719.49 63.98,761.81 63.98,822.83 80.71,839.57 80.71,888.78 62.01,907.48 62.01,1101.38 83.66,1123.03 83.66,1295.28 93.5,1305.12 v1(162.4,1305.12)
  Solder Side w6: v1(106.3,718.5) 129.92,718.5 151.57,740.16 334.65,740.16 344.49,730.32 v1(344.49,729.33)
USB_D_N: R3.1 U3.D1 | length 148.8
  Component Side w6: U3.D1@233.27,1254.92 233.27,1221.46 290.35,1164.37 R3.1@325,1164.37
USB_D_P: R2.1 U3.C1 | length 176.8
  Component Side w6: U3.C1@217.52,1254.92 217.52,1219.49 R2.1@317.5,1119.51
USB_N: R3.2 U1.70 | length 533.3
  Component Side w15: R3.2@375,1166.34 396.61,1144.73 v1(407.48,1144.73) ; U1.70@825.24,1216.73 825.24,1146.19 v1(826.7,1144.73)
  Inner Layer 1 w15: v1(407.48,1144.73) v1(826.7,1144.73)
USB_P: R2.2 U1.69 | length 575.5
  Component Side w15: R2.2@375,1113.19 395,1113.19 403.54,1121.73 v1(407.48,1121.73) ; v1(826.7,1121.73) 834.7,1121.73 847.7,1134.73 847.7,1155.73 876.42,1184.46 U1.69@876.42,1216.73
  Inner Layer 1 w15: v1(407.48,1121.73) v1(826.7,1121.73)
USB_VBUS: R1.2 U1.71 | length 445.6
  Component Side w8: U1.71@774.06,1216.73 774.06,1273.09 784.7,1283.73 861.49,1283.73 887.8,1310.04 887.8,1535.43 R1.2@912.4,1560.04
USIM_CLK: R14.1 U1.16 | length 150.4
  Component Side w12: U1.16@479.33,261.81 v1(547.24,261.81)
  Solder Side w6: R14.1@626.97,261.81 R14.1@628.94,259.84
  Solder Side w12: v1(547.24,261.81) R14.1@626.97,261.81
USIM_D: R13.1 U1.15 | length 107.7
  Component Side w12: U1.15@479.33,312.99 v1(543.31,312.99)
  Solder Side w6: R13.1@582.87,312.99 R13.1@585.83,315.94
  Solder Side w12: v1(543.31,312.99) R13.1@582.87,312.99
USIM_GND: C38.2 JC1.5 U1.10 | length 361.5
  Component Side w25: U1.10@479.33,568.9 v1(540.35,568.9)
  Solder Side w25: v1(540.35,568.9) 565.94,543.31 565.94,490.16 C38.2@582.68,473.43 645.38,473.43 663.1,455.71 762.8,455.71
USIM_RST: R15.1 U1.17 | length 94.5
  Component Side w12: U1.17@479.33,210.63 v1(542.32,210.63)
  Solder Side w12: v1(542.32,210.63) R15.1@573.82,210.63
USIM_VDD: C38.1 CR1.3 JC1.1 R17.2 U1.14 | length 828.7
  Component Side w25: U1.14@479.33,364.17 v1(542.32,364.17)
  Inner Layer 2 w25: v1(813.98,194.88) 862.2,243.11 862.2,333.66 v1(834.65,361.22)
  Solder Side w25: v1(542.32,364.17) 542.32,381.69 583.66,423.03 635.63,423.03 R17.2@635.83,423.23 665.35,423.23 709.65,378.94 797.24,378.94 807.09,388.78 ; 762.8,505.71 786.61,505.71 816.93,475.39 816.93,398.62 807.09,388.78 ; CR1.3@769.69,181.84 800.94,181.84 v1(813.98,194.88) ; v1(834.65,361.22) 807.09,388.78
pads on no net: JC1.6 JC1.CD U1.1 U1.3 U1.13 U1.18 U1.23 U1.24 U1.25 U1.26 U1.27 U1.28 U1.29 U1.30 U1.31 U1.32 U1.33 U1.34 U1.37 U1.38 U1.39 U1.40 U1.41 U1.42 U1.43 U1.44 U1.45 U1.55 U1.63 U1.64 U1.65 U1.66 U1.113 U1.114 U1.115 U1.116 U1.117 U1.118 U1.119 U1.120 U1.121 U1.122 U1.123 U1.124 U1.125 U1.126 U1.127 U1.128 U1.129 U1.130 U1.131 U1.132 U1.133 U1.134 U1.135 U1.136 U1.137 U1.138 U1.139 U1.140 U1.141 U1.142 U1.143 U1.144 U3.A3 U3.A5 U3.B3 U3.B4 U3.B5 U3.B8 U3.C4 U3.C5 U3.E3 U3.E7 U3.E8 U3.F8 U3.F9 U3.G5 U3.H6 U3.J7 U4.9 U6.3 U6.5 U7.2 U7.3 U7.4 U7.5 U7.6 U7.7 U7.14 U7.15 U7.16 U7.17 U7.19 U7.21
copper on no net:
  other v3: 1219.49,377.95 1219.49,712.99
  other v4: 315.94,321.85

## Polygon pours and split planes (outlines as drawn)
5V_IN on Power Plane (VCC) (split plane): 1774.19,1462.84 1694.88,1462.84 1692.27,1462.5 1689.84,1461.49 1687.75,1459.89 1672.99,1445.12 1671.38,1443.04 1670.38,1440.6 1670.03,1437.99 1670.03,1401.82 1653.3,1385.09 1298.97,1385.09 1296.36,1384.74 1295.35,1384.33 1293.93,1383.73 1291.84,1382.13 1253.52,1343.82 904.79,1343.82 904.79,1380.73 904.79,1584.23 1774.19,1584.23
3P8_VBAT on Power Plane (VCC) (split plane): 1774.19,1173.82 907.79,1173.82 907.79,1322.73 907.67,1323.65 1257.7,1323.65 1260.31,1323.99 1262.74,1325 1264.83,1326.6 1303.15,1364.91 1657.48,1364.91 1660.09,1365.26 1662.52,1366.27 1664.61,1367.87 1687.25,1390.51 1688.85,1392.59 1689.86,1395.03 1690.2,1397.64 1690.2,1433.81 1699.06,1442.67 1774.19,1442.67
3P3_MCU on Power Plane (VCC) (split plane): 884.61,1380.73 884.61,1332.85 884.96,1330.24 885.97,1327.81 887.57,1325.72 887.98,1325.4 887.96,1325.34 887.61,1322.73 887.61,1163.73 887.96,1161.12 888.97,1158.69 890.57,1156.6 892.66,1155 895.09,1153.99 897.7,1153.65 1774.19,1153.65 1774.19,46.83 48.8,46.83 48.8,1584.23 884.61,1584.23
GND on Ground Plane (GND) (split plane): 1774.19,46.83 48.8,46.83 48.8,1584.23 1774.19,1584.23

## Keep-outs
Keep-Out Layer:
  lines w10: 28.7,26.73 28.7,1604.33 1794.29,1604.33 1794.29,26.73 28.7,26.73 ; 28.7,26.73 23.7,26.73 23.7,21.73 28.7,21.73 28.7,26.73 ; 13.7,11.73 13.7,42.32 38.7,42.32 38.7,11.73 13.7,11.73

## Other copper
Component Side:
  rectangle net 3P8_VBAT: 1706.69,1257.87 1726.38,1290.35
  rectangle net GND: 1280.51,692.91 1316.93,808.07
  rectangle net GND: 1397.64,670.28 1430.12,1013.78
  rectangle net GND: 1293.31,862.2 1305.12,1018.7
  rectangle net GND: 894.69,663.39 914.37,1016.73
  rectangle net GND: 765.75,664.37 801.18,992.13
  rectangle net GND: 786.42,824.8 1414.37,863.19
  rectangle net GND: 784.45,1023.62 1437.99,1062.01
  rectangle net GND: 1402.56,250 1435.04,663.39
  rectangle net GND: 1288.39,260.83 1325.79,646.65
  rectangle net GND: 894.69,271.65 915.35,634.84
  rectangle net GND: 762.8,303.15 800.2,629.92
  rectangle net GND: 1308.07,636.81 1419.29,672.24
  rectangle net GND: 775.59,644.69 906.5,673.23
  rectangle net GND: 796.26,244.09 1427.17,295.28
  rectangle net GND: 788.39,453.74 1406.5,483.27
  rectangle net NetC39_1: 1166.7,1337.73 1266.95,1379.73
  rectangle net NetC39_1: 1166.57,1324.52 1190.49,1403.26
  rectangle net NetC39_1: 1185.7,1373.73 1202.7,1390.73
  rectangle net NetC39_1: 1187.7,1329.73 1201.7,1344.73
  rectangle net 3P8_VBAT: 1325.7,1337.73 1405.51,1377.73
  rectangle net 5V_IN: 1412.4,1462.6 1516.73,1583.66
  rectangle net 5V_IN: 1217.52,1482.28 1441.93,1583.66
  text ".Hole_Count" at 1991.14,631.89 h20 r90
  text "Drilling Details." at 1934.06,418.31 h20 r90
  text "Hole_Count:" at 1989.17,418.31 h20 r90
Solder Side:
  rectangle net 3P3_MCU: 660.7,1504.92 824.7,1566.73
  rectangle net NetC43_2: 780.7,1413.73 800.7,1468.73
Power Plane (VCC) (plane layer: these items are gaps in the copper):
  lines w20: 894.7,1607.28 894.7,1380.73 894.7,1332.85 895.58,1333.73 1034.44,1333.73 1257.7,1333.73 1298.97,1375 1388.6,1375 1567.85,1375 1657.48,1375 1680.12,1397.64 1680.12,1437.99 1694.88,1452.76 1800.2,1452.76 ; 897.7,1322.73 897.7,1163.73 1056.7,1163.73 1794.29,1163.73

## Silkscreen, mask and mechanical layers (free items; w line width, h text height)
Top Overlay:
  lines w3.94: 1438.98,1568.9 1475.39,1568.9 ; 1457.68,1558.07 1457.68,1581.69 ; 1655.51,1563.98 1685.04,1563.98 ; 1669.29,1552.17 1669.29,1576.77
  lines w4: 58.07,610.24 58.07,598.43 59.06,597.44 69.88,597.44 71.85,599.41 71.85,610.24 ; 69.88,298.23 61.02,298.23 61.02,313.98 71.85,313.98 ; 80.71,297.24 80.71,312.99 91.54,312.99 91.54,303.15 ; 80.71,303.15 91.54,303.15 ; 89.57,305.12 91.54,303.15 ; 102.36,312.99 102.36,299.21 114.17,299.21 114.17,312.01 ; 123.03,578.74 142.72,578.74 ; 124.02,396.65 124.02,420.28 136.81,420.28 ; 124.02,495.08 124.02,519.68 137.8,519.68 137.8,510.83 136.81,509.84 124.02,509.84 136.44,497.42 ; 125,446.85 125,465.55 ; 132.87,560.04 132.87,578.74 ; 136.81,398.62 124.02,411.42 135.83,411.42 136.81,410.43 136.81,420.28 ; 136.81,420.28 136.81,420.28
  text "5V_IN" at 1544.29,1568.9 h12
  text "Cell" at 1704.72,1562.99 h15
Bottom Overlay:
  lines w5: 351.38,1283.73 1597.7,1283.73 1597.7,23.73
Drill Drawing:
  text ".LEGEND" at 1879.92,417.32 h20 r90
  text "Drill Drawing." at 1876.97,73.82 h20 r90

## Dimensions
23.7,21.73 to 23.7,26.73 on Mechanical 1
23.7,21.73 to 28.7,21.73 on Mechanical 1